# Altium PCB PCB_V0.PcbDoc
Units mm, origin at the board's own origin, x right, y up, seen from the top; angles counter-clockwise.
Board outline 58 x 52 mm, 2 copper layers (Top Layer, Bottom Layer); 42 components, 24 nets, 98 pads, 8 vias.
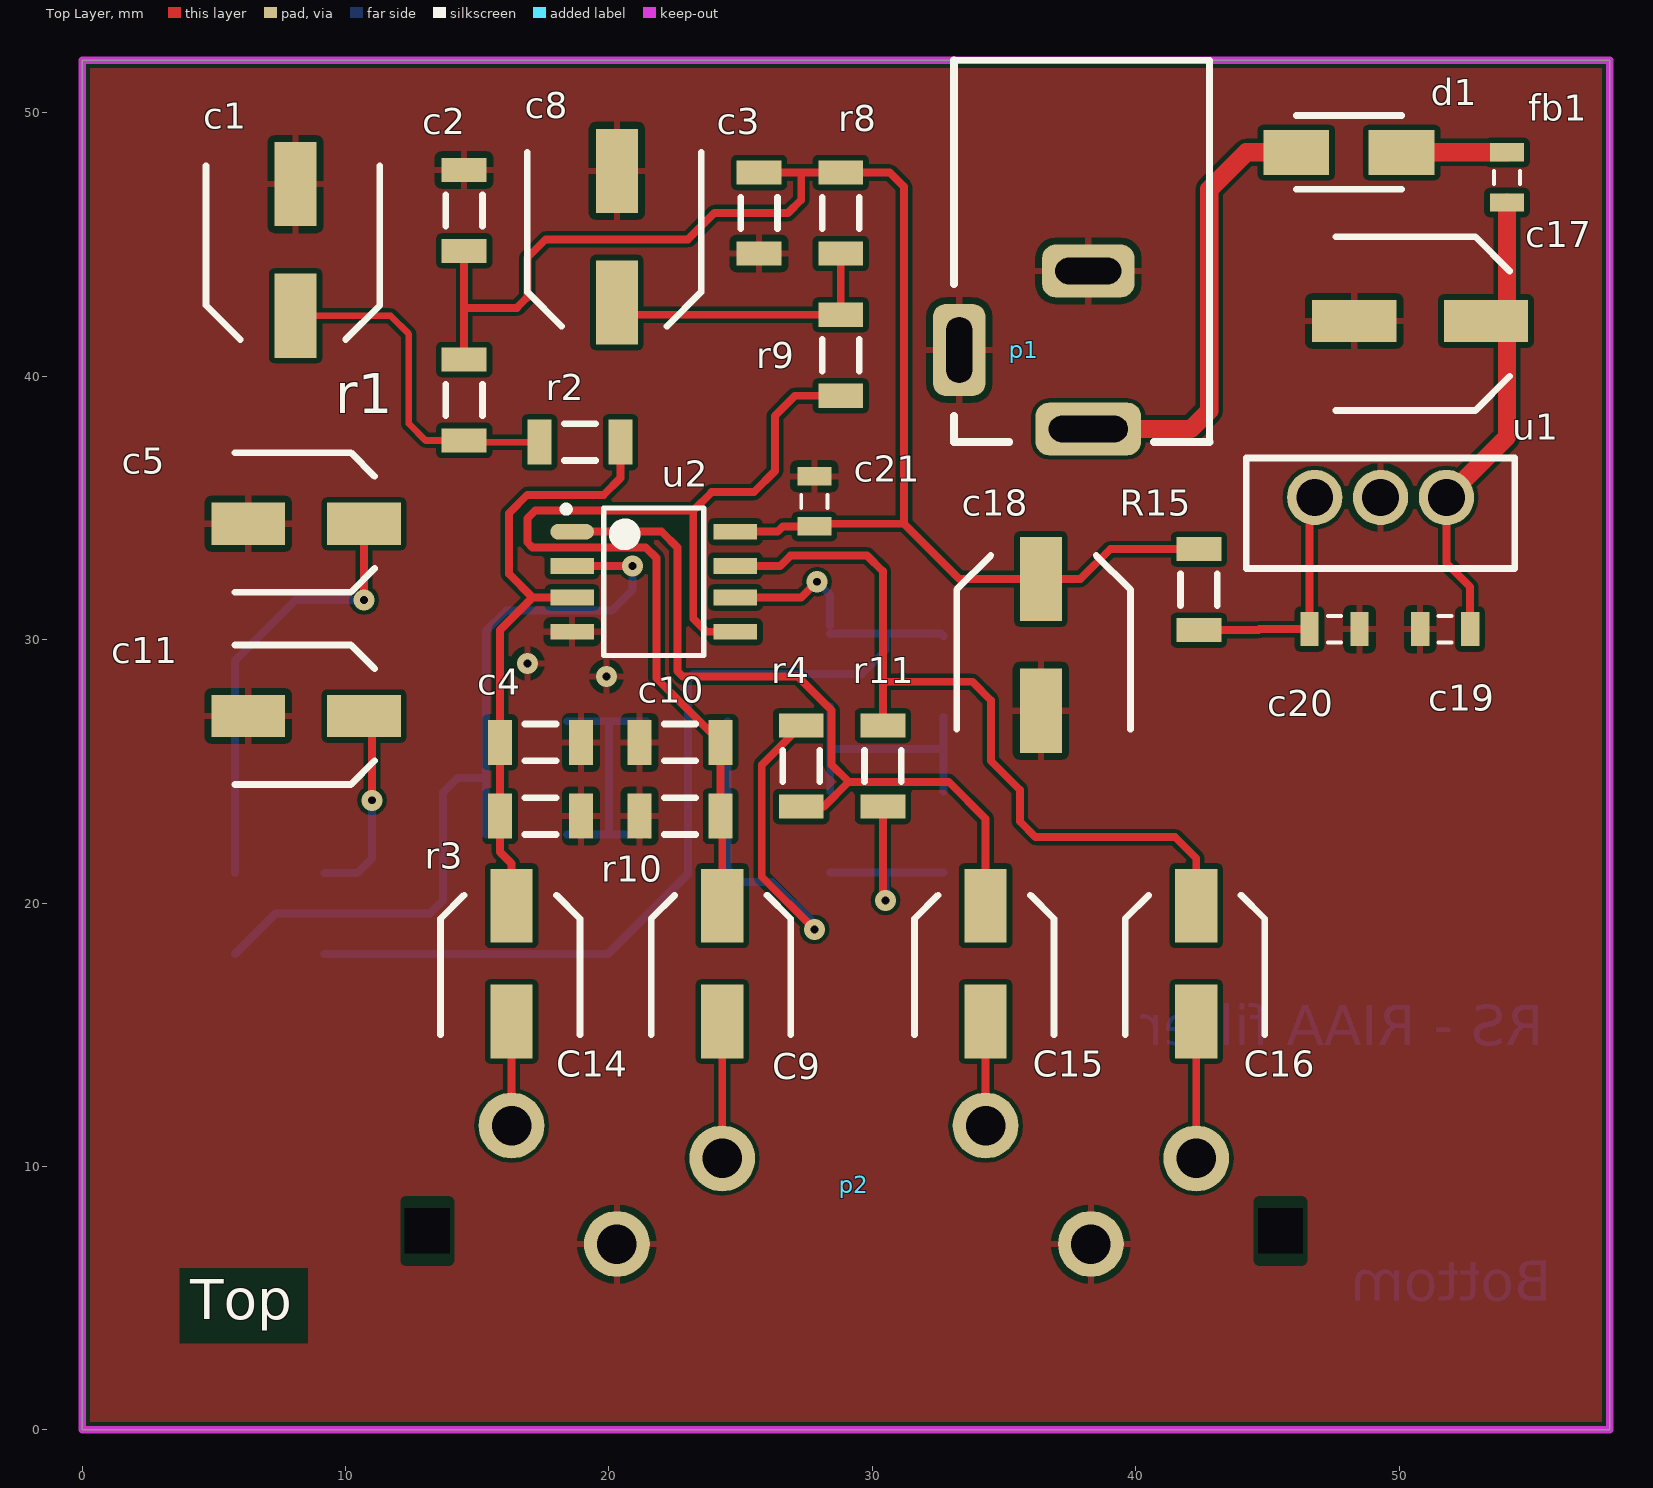
[diagram p0: Top Layer view]
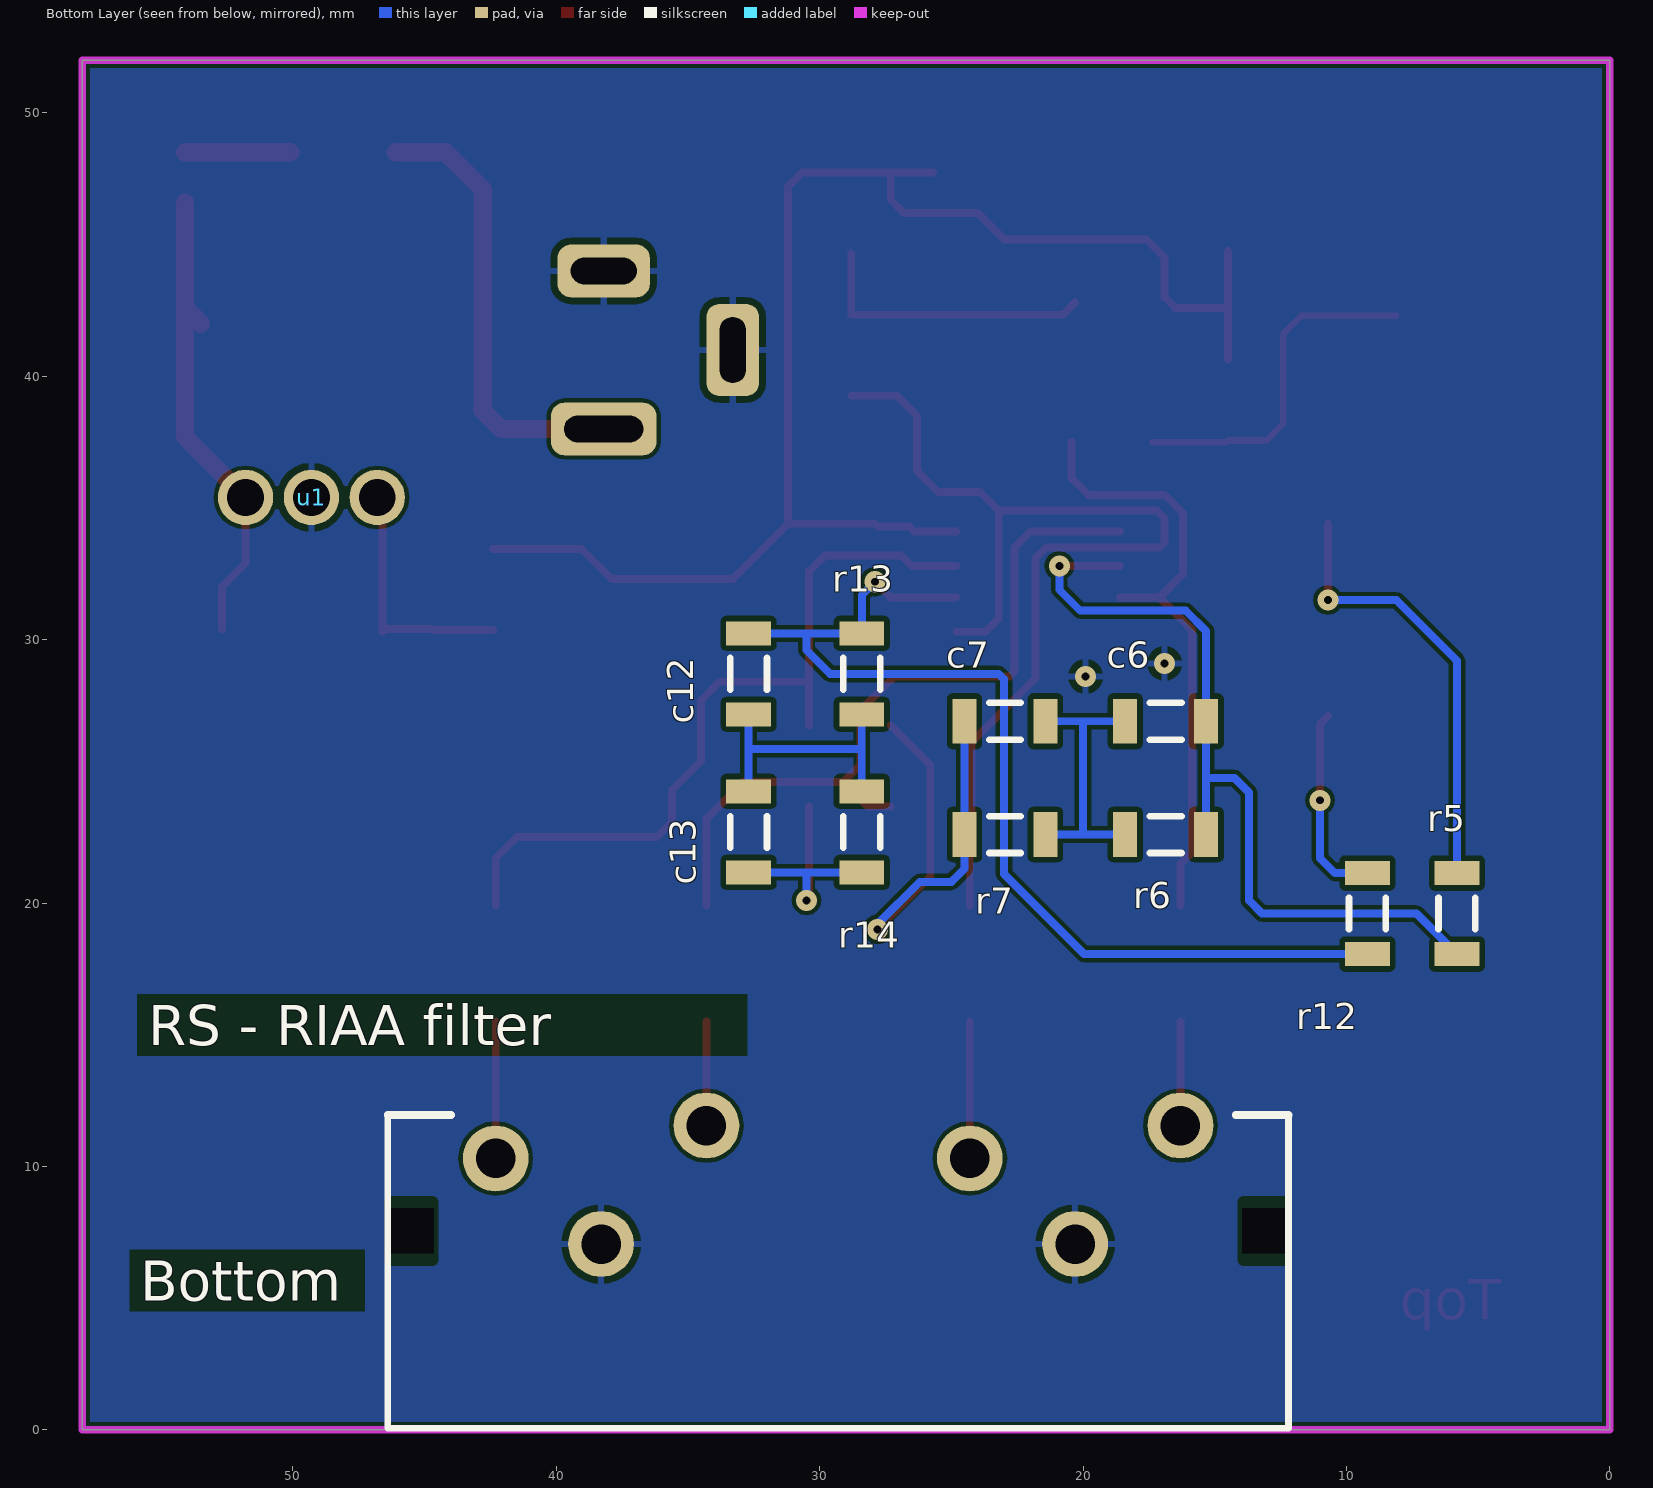
[diagram p1: Bottom Layer view, seen from below]
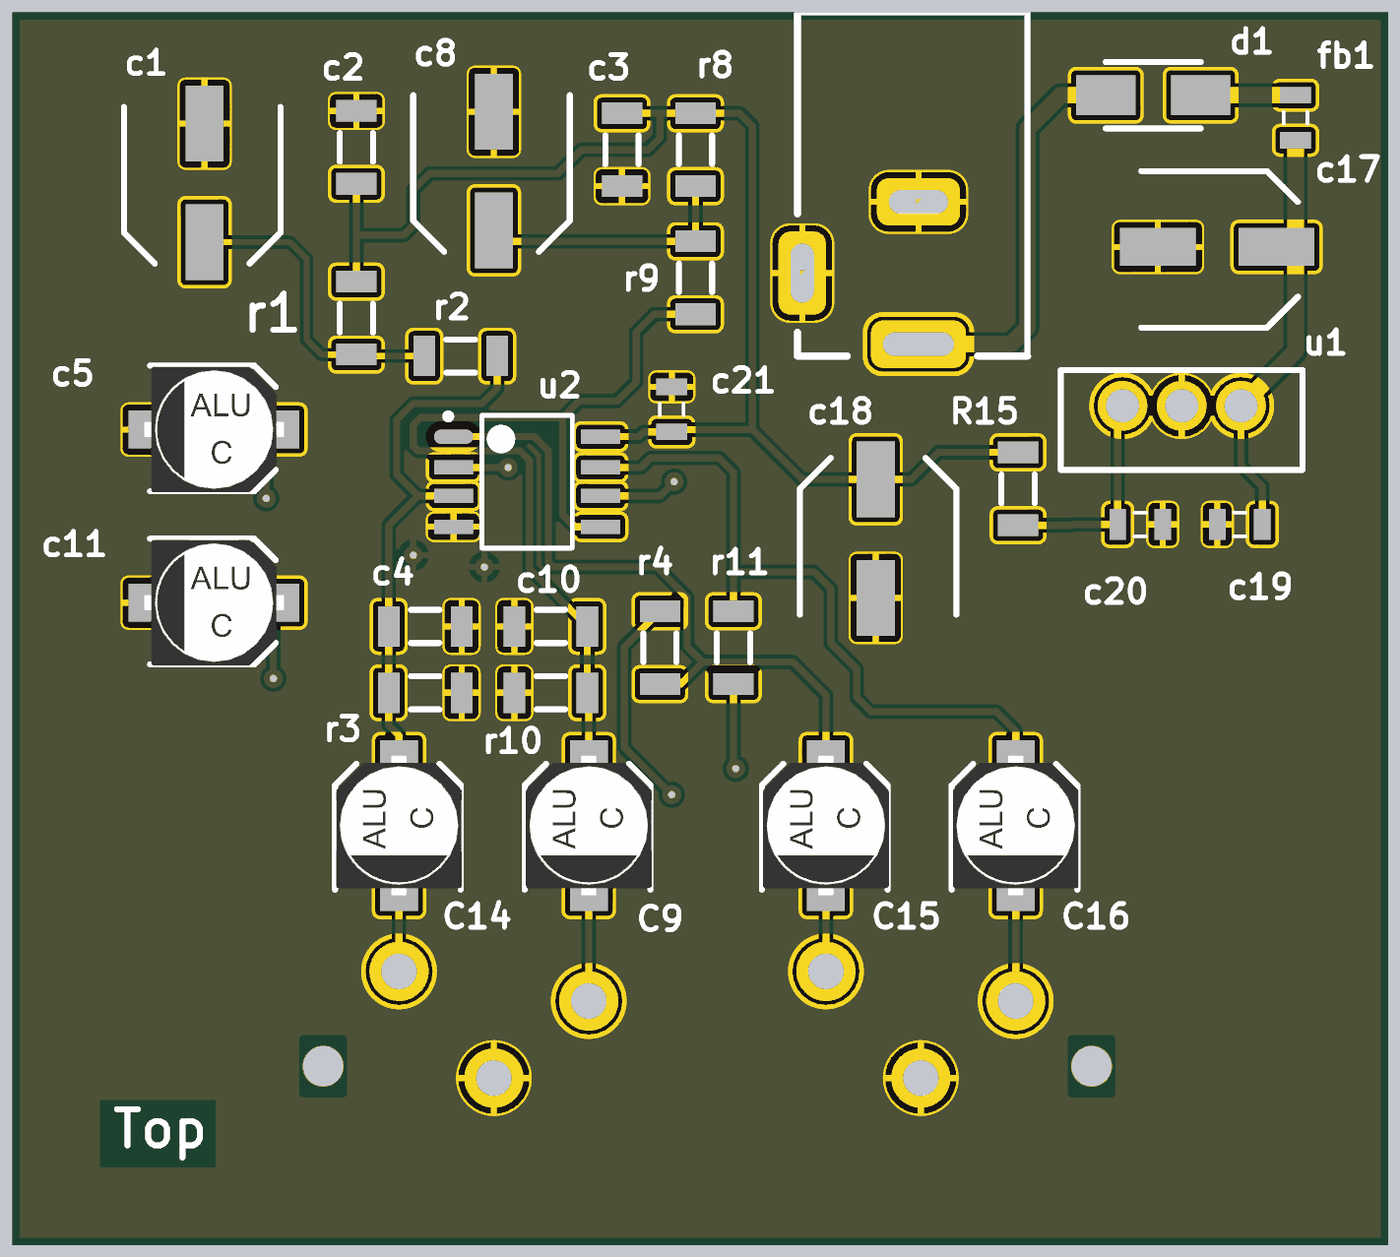
[diagram p2: 3D render of the assembled board from above, using the file's embedded part models]
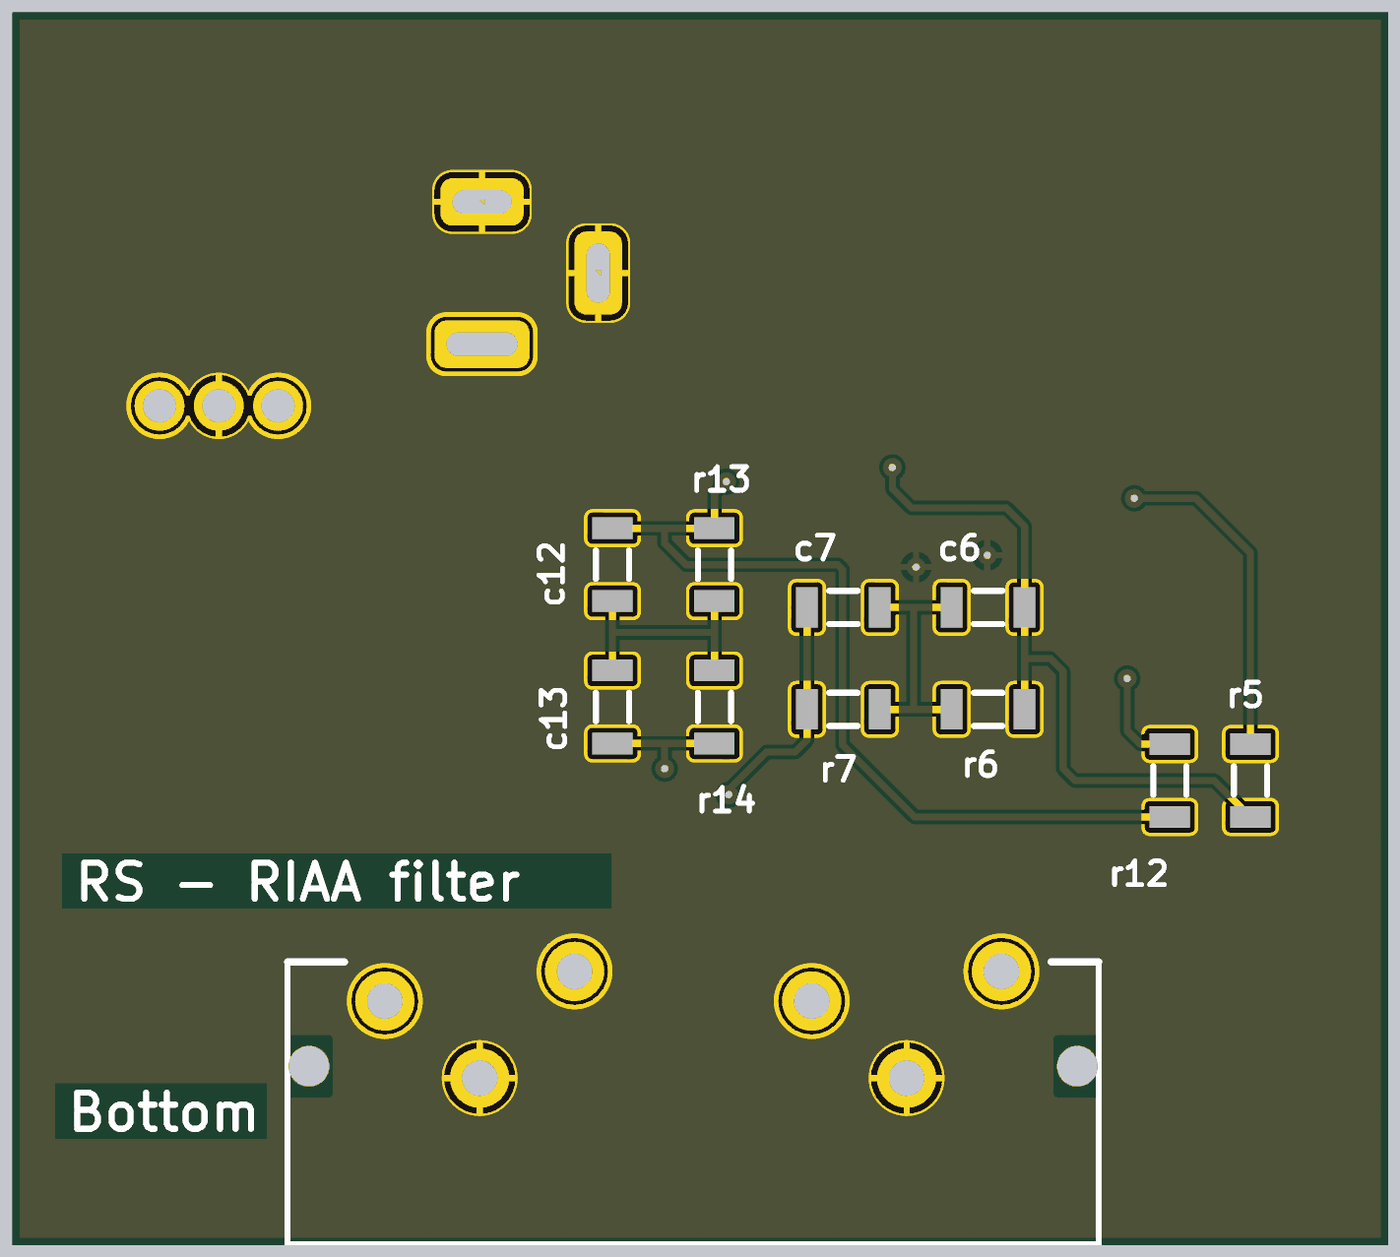
[diagram p3: 3D render of the assembled board from below, using the file's embedded part models]

## Layer stack, top to bottom
Top Solder: solder mask 0.0102, Solder Resist, Dk 3.5
Top Layer: signal copper 0.0356
Dielectric 1: dielectric 0.32, FR-4, Dk 4.8
Bottom Layer: signal copper 0.0356
Bottom Solder: solder mask 0.0102, Solder Resist, Dk 3.5

## Board outline
0,0 58,0 58,52 0,52

## Design rules (kind name [scope] priority, off if disabled: settings)
Clearance [All] p1: gap=0.152 ignorepadtopadclearanceinfootprint=FALSE except(0.203: SMDPad-SMDPad SMDPad-THPad SMDPad-Via SMDPad-Fill SMDPad-Poly SMDPad-Region SMDPad-Text)
Height [All] p1: minheight=0 maxheight=30 prefheight=12.7
PolygonConnect [All] p1: connectstyle=Relief reliefconductorwidth=0.254 reliefentries=4 polygonreliefangle="90 Angle" airgapwidth=0.254
RoutingVias [All] p1: holewidth=0.3 width=0.8 viastyle="Through Hole" minholewidth=0.2 minwidth=0.7 maxholewidth=0.711 maxwidth=1.27
SolderMaskExpansion [All] p1: expansion=0.35
Width [All] p1: maxlimit=1.2 minlimit=0.152 preferedwidth=0.3
29 further rules are at their usual default settings.

## Classes and differential pairs
component class "Power Supply": c17 c18 c19 c20 d1 fb1 p1 R15 u1
component class Amplifier&Filter: c1 c2 c3 c4 c5 c6 c7 c8 C9 c10 c11 c12 c13 C14 C15 C16 c21 p2 r1 r2 r3 r4 r5 r6 r7 r8 r9 r10 r11 r12 r13 r14 u2

## Components (designator, comment, footprint, x,y, rotation, side; value= is the part's Value field where it differs from the comment)
c1 "22µ" ELCO-D 8.1,44.8 r270 top
c2 "100n" 1206 14.5,46.3 r90 top
c3 "100n" 1206 25.7,46.2 r270 top
c4 "100p" 1206 17.4,26.1 r0 top
c5 "10µF" ELCO-C 8.5,34.4 r0 top
c6 "3n3" 1206 16.863,26.9 r0 bottom
c7 "15n" 1206 22.963,26.9 r0 bottom
c8 "22µ" ELCO-D 20.3,45.3 r270 top
C9 "4.7µF" ELCO-C 24.3,17.7 r90 top
c10 "100p" 1206 22.7,26.1 r180 top
c11 "10µF" ELCO-C 8.5,27.1 r0 top
c12 "3n3" 1206 32.7,28.7 r270 bottom
c13 "15n" 1206 32.7,22.7 r270 bottom
C14 "4.7µF" ELCO-C 16.3,17.7 r90 top
C15 "4.7µF" ELCO-C 34.3,17.7 r90 top
C16 "4.7µF" ELCO-C 42.3,17.7 r90 top
c17 "100µ" ELCO-D 50.8,42.1 r0 top
c18 "47µ" ELCO-D 36.4,29.8 r90 top
c19 "330n" 0805 52.7,30.4 r180 top
c20 "100n" 0805 48.5,30.4 r180 top
c21 "100n" 0805 27.8,34.3 r90 top
d1 "B220A-13-F" SMA 48.1,48.5 r0 top
fb1 "Ferrite Bead" 0805 54.1,48.5 r270 top
p1 "DC Power Jack" "POWER JACK" 38.2,41 r270 top
p2 "PSG01551" "RCA 4-WAY" 39.5,9.45 r180 top
r1 "18k" 1206 14.5,39.1 r90 top
r2 "100k" 1206 18.9,37.5 r0 top
r3 "120k" 1206 17.4,23.3 r0 top
r4 "1k" 1206 27.3,25.2 r90 top
r5 "820R" 1206 5.8,19.6 r270 bottom
r6 "22k" 1206 16.863,22.6 r0 bottom
r7 "220k" 1206 22.963,22.6 r0 bottom
r8 "18k" 1206 28.8,46.2 r90 top
r9 "100k" 1206 28.8,40.8 r270 top
r10 "120k" 1206 22.7,23.3 r180 top
r11 "1k" 1206 30.4,25.2 r270 top
r12 "820R" 1206 9.2,19.6 r270 bottom
r13 "22k" 1206 28.4,28.7 r270 bottom
r14 "220k" 1206 28.4,22.7 r270 bottom
R15 "10" 1206 42.4,31.9 r90 top
u1 "LM7809" TO-220AB-3 49.3,35.4 r0 bottom
u2 "NE5532x" R-PDSO-G8-P127D620X530 22,32.2 r0 top

## Footprints (in the part's own frame and the unit in brackets; to place one, negate y for a bottom-side part, rotate by r counter-clockwise, add the part's x,y. Pads: shape width x height; smd on the part's side, far side on the other; paste and mask are expansions set on the pad)
0805 [mm]
  rect 0.7x1.3 smd: 1(0,0) 2(1.9,0)
  silkscreen extent 0.7,-0.5 1.2,0.5, body extent -0.05,-0.63 1.95,0.63, height 0.43
1206 [mm]
  rect 0.914x1.702 smd: 1(-1.537,0) 2(1.537,0)
  silkscreen extent -0.6,-0.7 0.6,0.7, body extent -1.6,-0.83 1.6,0.83, height 0.53
ELCO-C [mm] "SMD Electrolytic Capacitor-Size B-Pitch 1mm-5.3mm x 5.4mm"
  rect 2.8x1.6 smd: 1(-2.2,0) 2(2.2,0)
  silkscreen extent -2.7,-2.6 2.6,2.7, body extent -2.95,-2.65 2.95,2.65, height 5.41
ELCO-D [mm] "SMD Electrolytic Capacitor-Size D-Pitch 1.8mm-6.3mm x 5.4mm"
  rect 3.2x1.6 smd: 1(-2.5,0) 2(2.5,0)
  silkscreen extent -3.2,-3.4 3.4,3.2, body extent -3.15,-2.65 3.15,2.65, height 5.7
"POWER JACK" [mm] "6mm Jack plug"
  rrect50% 2x4 hole 1 slot 3 at 90 deg: 1(3,0)
  rrect50% 2x3.5 hole 1 slot 2.5 at 90 deg: 2(-3,0)
  rrect50% 3.5x2 hole 1 slot 2.5 at 0 deg: 2(0,-4.9)
  silkscreen extent -11,-5.1 3.5,4.6, body extent -11.05,-5.15 3.45,4.65, height 11
R-PDSO-G8-P127D620X530 [mm] "TI SOIC8 package, 127 Pitch, 620x530 Dimensions"
  oval 1.65x0.6 smd: 1(-3.4,1.9)
  rect 1.65x0.6 smd: 2(-3.4,0.6) 3(-3.4,-0.6) 4(-3.4,-1.9) 5(2.8,-1.9) 6(2.8,-0.6) 7(2.8,0.6) 8(2.8,1.9)
  silkscreen extent -3.75,-2.8 1.6,2.88, body extent -3.43,-2.5 2.83,2.5, height 1.75
"RCA 4-WAY" [mm] "Vertical RCA connector with 4 connectors"
  round 2.5 hole 1.5: 1(19.2,2.4) 2(15.2,-0.85) 3(23.2,-2.1) 4(1.2,2.4) 5(-2.8,-0.85) 6(5.2,-2.1)
  rect 0x0 hole 1.7 square: ""(-6,1.9) ""(26.4,1.9)
SMA [mm] "SMA Diode Package"
  rect 2.5x1.7 smd: 1(-2,0) 2(2,0)
  silkscreen extent -2,-1.4 2,1.4, body extent -2.56,-1.7 2.76,1.7, height 2.2
TO-220AB-3 [mm] "Transistor Outline"
  round 2.1 hole 1.4: 1(2.5,0) 2(0,0) 3(-2.5,0)
  body extent -5.08,-1.5 5.08,2.7, height 18.87

## Part data
c1 c8 c17 c18: library part "Elco D", "Elco size D 6.3x5.4"
c2 c3 c19 c20 c21: library part "0805 Capacitor", "0805 Capacitor Package"
c4 c6 c7 c10 c12 c13: library part "1206 Cap", "Capacitor package 1206"
c5 C9 c11 C14 C15 C16: library part "Elco C"
d1: "Schottky Rectifier"
fb1: library part "Ferrite Bead 0805 Package"
p2: "4-way RCA connector"
r1 r2 r3 r4 r5 r6 r7 r8 r9 r10 r11 r12 r13 r14 R15: library part "1206 Resistor", "Resistor Package 1206"
u1: "Positive voltage regulator to 9V"
u2: "Dual Low-Noise OpAmp"

## Via types
v1: diameter 0.8, hole 0.3, Top Layer to Bottom Layer, tented both sides, 8 vias

## Nets (pads, with @x,y where several pads share a name; then routed paths per layer and width w, separated by ;. In a path a pad name is that pad's centre, name@x,y a point inside that pad or via, vN(x,y) a via of type N, cw(c..) or ccw(c..) an arc to the next point about the centre after c; other vN are vias at no path point)
GND: c1.1 c2.2 c3.2 c4.2 c5.1 c8.1 c10.2 c11.1 c17.1 c18.1 c19.2 c20.1 c21.2 p1.2 p2.1 p2.4 r3.2 r10.2 u1.2 u2.4
  other v1: 19.9,28.6 16.9,29.1
Netc1_2: c1.2 r1.1 r2.1 | length 13.2
  Top Layer w0.254: c1.2 11.7,42.3 12.4,41.6 12.4,38.2 13.037,37.563 r1.1 14.563,37.5 r2.1
Netc4_1: c4.1 C14.2 r2.2 r3.1 u2.3 | length 23.6
  Top Layer w0.3: C14.2 16.3,21.5 15.863,21.937 r3.1 c4.1 15.863,30.363 17.1,31.6 ; u2.3 17.1,31.6 ; r2.2 20.437,36.137 19.8,35.5 16.9,35.5 16.2,34.8 16.2,32.5 17.1,31.6
Netc5_2: c5.2 r5.1 | length 16.8
  Top Layer w0.3: v1(10.7,31.5) c5.2
  Bottom Layer w0.3: r5.1 5.8,29.2 8.1,31.5 v1(10.7,31.5)
Netc6_1: c6.1 r5.2 r6.1 u2.2 | length 31.8
  Top Layer w0.3: u2.2 v1(20.9,32.8)
  Bottom Layer w0.3: r5.2 7.337,19.6 13.2,19.6 13.7,20.1 13.7,24.2 14.25,24.75 15.326,24.75 ; r6.1 15.326,24.75 ; v1(20.9,32.8) 20.9,31.9 20.1,31.1 16.1,31.1 15.326,30.326 c6.1 15.326,24.75
Netc6_2: c6.2 c7.1 r6.2 r7.1 | length 10.4
  Bottom Layer w0.3: r6.2 20,22.6 ; c6.2 20,26.9 ; r7.1 20,22.6 ; c7.1 20,26.9 ; 20,22.6 20,26.9
Netc7_2: c7.2 r4.2 r7.2 | length 19.2
  Top Layer w0.3: r4.2 25.8,25.237 25.8,21 v1(27.8,19)
  Bottom Layer w0.3: c7.2 r7.2 24.5,21.3 25,20.8 26.2,20.8 27.8,19.2 v1(27.8,19)
Netc8_2: c8.2 r8.1 r9.1 | length 11
  Top Layer w0.3: c8.2 20.763,42.337 r9.1 r8.1
NetC9_1: C9.1 p2.2 | length 5.2
  Top Layer w0.3: p2.2 C9.1
NetC9_2: C9.2 c10.1 r9.2 r10.1 u2.5 | length 41.3
  Top Layer w0.3: C9.2 24.3,23.237 r10.1 c10.1 21.8,28.537 21.8,33.1 21.398,33.502 19.727,33.502 19.723,33.498 17.302,33.498 17.3,33.5 17.1,33.5 16.9,33.7 16.9,34.6 17.2,34.9 23.2,34.9 ; u2.5 23.7,30.3 23.2,30.8 23.2,34.9 ; r9.2 27.063,39.263 26.3,38.5 26.3,36.4 25.5,35.6 23.9,35.6 23.2,34.9
Netc11_2: c11.2 r12.1 | length 7.6
  Top Layer w0.3: c11.2 11,26.8 v1(11,23.9)
  Bottom Layer w0.3: r12.1 10.437,21.137 11,21.7 v1(11,23.9)
Netc12_1: c12.1 r12.2 r13.1 u2.6 | length 40.6
  Top Layer w0.3: u2.6 27.3,31.6 v1(27.9,32.2)
  Bottom Layer w0.3: r12.2 19.963,18.063 23,21.1 23,28.5 23.2,28.7 29.6,28.7 30.5,29.6 30.5,30.237 ; v1(27.9,32.2) 28.4,31.7 r13.1@28.4,30.537 ; r13.1 30.5,30.237 ; c12.1@32.7,30.137 32.6,30.237 30.5,30.237
Netc12_2: c12.2 c13.1 r13.2 r14.1 | length 10.4
  Bottom Layer w0.3: r14.1 28.4,25.85 ; r13.2@28.4,27.463 28.4,25.85 ; c13.1 32.7,25.9 ; c12.2@32.7,27.063 32.7,25.9 ; 28.4,25.85 32.65,25.85 32.7,25.9
Netc13_2: c13.2 r11.2 r14.2 | length 9
  Top Layer w0.3: r11.2 30.4,20.2 v1(30.5,20.1)
  Bottom Layer w0.3: r14.2 30.5,21.163 ; v1(30.5,20.1) 30.5,21.163 ; c13.2 30.5,21.163
NetC14_1: C14.1 p2.3 | length 3.9
  Top Layer w0.3: p2.3 C14.1
NetC15_1: C15.1 p2.6 | length 4
  Top Layer w0.3: p2.6 C15.1
NetC15_2: C15.2 r4.1 u2.1 | length 29.7
  Top Layer w0.3: u2.1 22,34.1 22.6,33.5 22.6,28.8 22.8,28.6 27.173,28.6 28.453,27.319 28.453,25.247 29.1,24.6 ; r4.1 28.163,23.663 29.1,24.6 ; C15.2 34.3,23.2 32.9,24.6 29.1,24.6
NetC16_1: C16.1 p2.5 | length 5.2
  Top Layer w0.3: p2.5 C16.1
NetC16_2: C16.2 r11.1 u2.7 | length 30.4
  Top Layer w0.3: u2.7 26.5,32.8 26.9,33.2 29.8,33.2 30.4,32.6 30.4,28.4 ; r11.1 30.4,28.4 ; C16.2 42.3,21.7 41.5,22.5 36.2,22.5 35.6,23.1 35.6,24.3 34.5,25.4 34.5,27.7 33.8,28.4 30.4,28.4
Netc17_2: c17.2 c19.1 fb1.2 u1.1 | length 18.4
  Top Layer w0.3: u1.1 51.8,32.9 52.7,32 c19.1
  Top Layer w0.7: u1.1 54.1,37.7 c17.2@54.1,42.6 ; c17.2@53.5,42 c17.2@54.1,42.6 ; fb1.2 c17.2@54.1,42.6
Netc20_2: c20.2 R15.1 u1.3 | length 9.4
  Top Layer w0.3: R15.1 44.663,30.363 44.7,30.4 c20.2 ; c20.2@46.6,30.3 c20.2 ; u1.3 46.6,35.2 c20.2
Netd1_1: d1.1 p1.1 | length 17.2
  Top Layer w0.7: p1.1 42.1,38 42.8,38.7 42.8,47.1 44.2,48.5 d1.1
Netd1_2: d1.2 fb1.1 | length 4
  Top Layer w0.7: d1.2 fb1.1
VCC: c2.1 c3.1 c18.2 c21.1 r1.2 r8.2 R15.2 u2.8 | length 58.1
  Top Layer w0.3: r1.2 14.5,42.6 ; c2.1 14.5,42.6 ; u2.8 26.4,34.1 26.6,34.3 c21.1 27.9,34.4 31.2,34.4 ; c3.1 27.3,47.737 ; R15.2 39.037,33.437 37.9,32.3 c18.2 33.3,32.3 31.2,34.4 ; 14.5,42.6 16.5,42.6 16.9,43 16.9,44.5 17.6,45.2 23,45.2 24,46.2 26.8,46.2 27.3,46.7 27.3,47.737 ; 27.3,47.737 r8.2 30.663,47.737 31.2,47.2 31.2,34.4
pads on no net: p2.

## Polygon pours and split planes (outlines as drawn)
GND on Top Layer "Top Layer-GND" (solid, remove dead copper, pour order 0): 0,0 0,52 58,52 58,0
GND on Bottom Layer "Bottom Layer-GND" (solid, remove dead copper, pour order 2): 0,0 0,52 58,52 58,0

## Keep-outs
Keep-Out Layer:
  the board outline again, w0.3

## Other copper
Top Layer:
  text "Top" at 4.1,4.2 h1.52
Bottom Layer:
  text "RS - RIAA filter" at 55.5,14.6 h1.52
  text "Bottom" at 55.8,4.9 h1.52

## Silkscreen, mask and mechanical layers (free items; w line width, h text height)
Top Overlay:
  text "Top" at 4.1,4.2 h1.52
Bottom Overlay:
  text "RS - RIAA filter" at 55.5,14.6 h1.52
  text "Bottom" at 55.8,4.9 h1.52
Mechanical 1:
  the board outline again, w0.3